# EAGLE board arduino micro based (EAGLE 7.6.0)
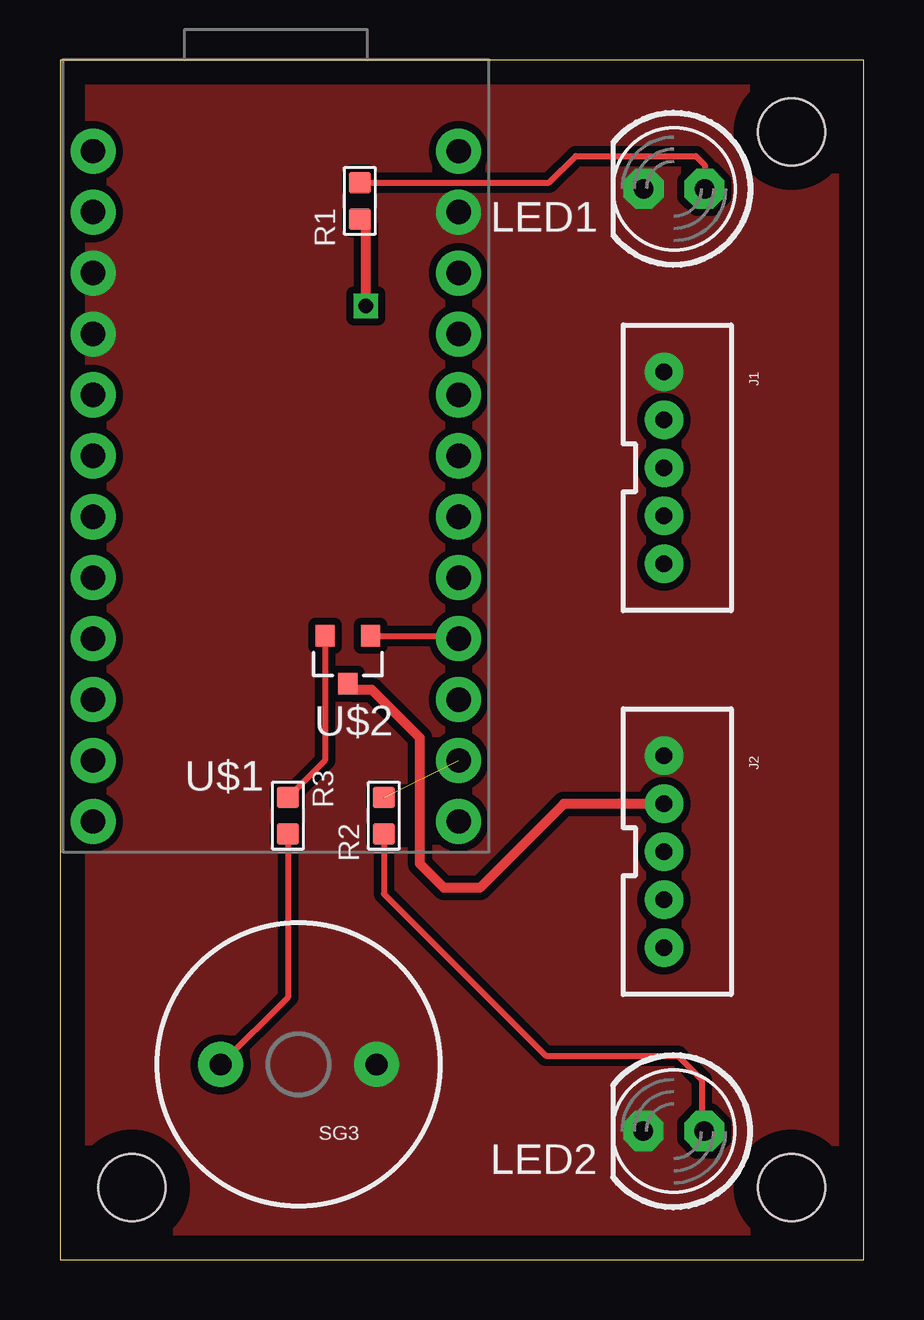
[diagram p0: board, top side]
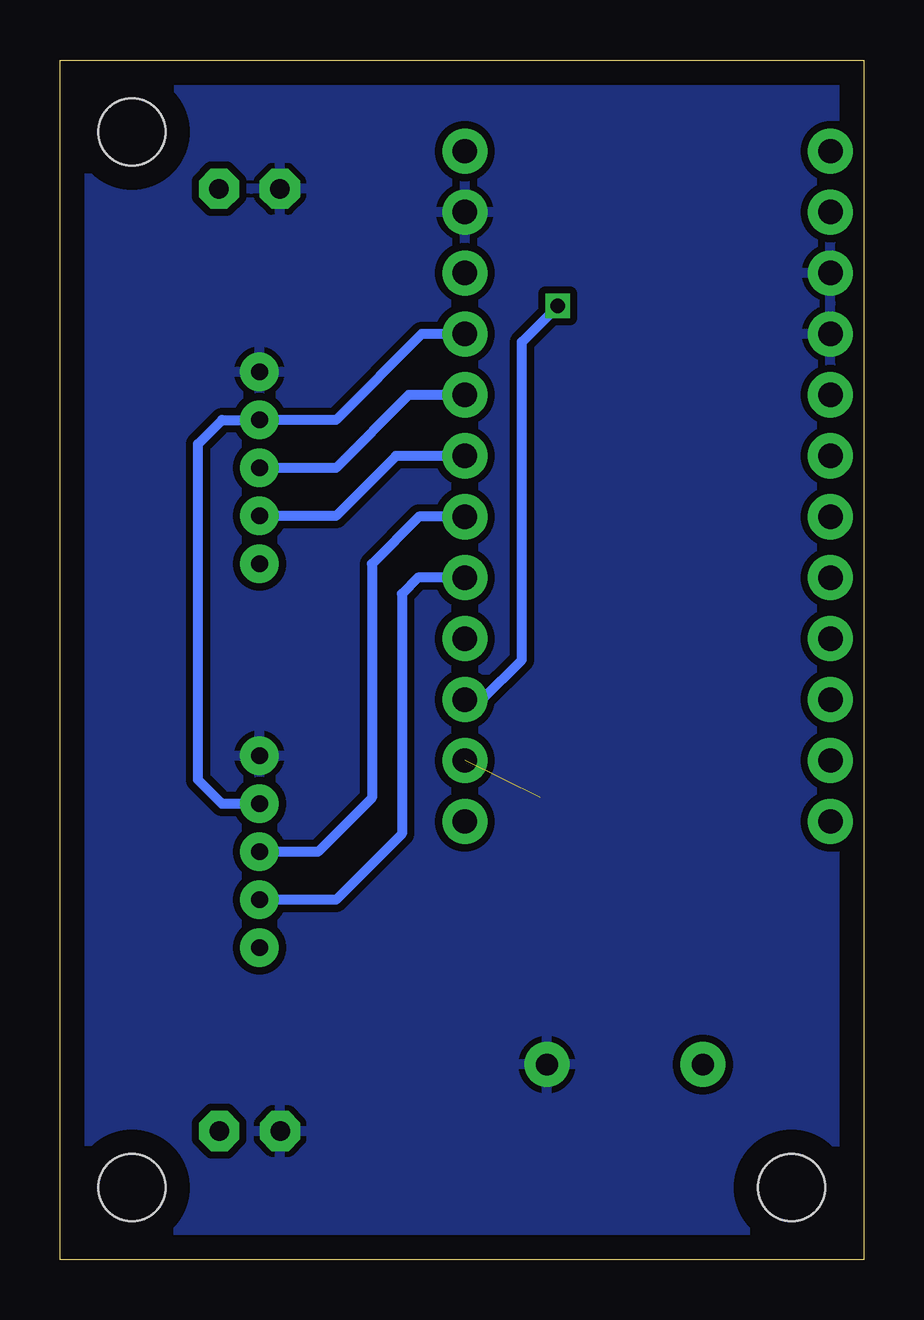
[diagram p1: board, bottom side, seen from below]

Size 33.5 x 50 mm. Coordinates in mm from the lower left corner, seen from the top.
Outline: 0,0 33.5,0 33.5,50 0,50 0,0
Copper layers (1*16): Top 0.035mm / dielectric 1.5mm / Bottom 0.035mm
Design rules "default": minimum track width 10mil, minimum drill 24mil, track to track 8mil, track to pad 8mil, pad to pad 8mil, via to via 8mil, smd to smd 8mil, copper to edge 40mil, drill to drill 8mil, minimum pad ring 10mil, minimum via ring 8mil, stop-mask expansion 4mil, vias tented up to drill 0mil, thermal gap 10mil
Holes 2.8 mm at 30.5,47 30.5,3 3,3

## Footprints (pad centres in the part's own frame; a part is rotated, then mirrored left to right if it is on the bottom)
JST-5-PTH-VERT = drill 0.7 pad 1.6: 1 -4,0.18; 2 -2,0.18; 3 0,0.18; 4 2,0.18; 5 4,0.18
LED5MM = drill 0.813 pad 1.676 octagon: A -1.27,0; K 1.27,0
R0603 = smd 0.889 x 0.889: 1 0,0.762; 2 0,-0.762
BUZZER-12MM-KIT = drill 0.9 pad 1.88: + 3.25,0; - -3.25,0
ARDUINO_PRO_MICRO = drill 1.016 pad 1.88: 1 -7.62,12.7; 2 -7.62,10.16; 3 -7.62,7.62; 4 -7.62,5.08; 5 -7.62,2.54; 6 -7.62,0; 7 -7.62,-2.54; 8 -7.62,-5.08; 9 -7.62,-7.62; 10 -7.62,-10.16; 11 -7.62,-12.7; 12 -7.62,-15.24; 13 7.62,-15.24; 14 7.62,-12.7; 15 7.62,-10.16; 16 7.62,-7.62; 17 7.62,-5.08; 18 7.62,-2.54; 19 7.62,0; 20 7.62,2.54; 21 7.62,5.08; 22 7.62,7.62; 23 7.62,10.16; 24 7.62,12.7
SOT23-3 = smd 0.8 x 0.9: 1 -0.95,-1; 2 0.95,-1; 3 0,1

## Placement (x,y rotation side)
J1  [JST-5-PTH-VERT]  25,33 270 top
J2  [JST-5-PTH-VERT]  25,17 270 top
LED1  [LED5MM]  25.6,44.63 180 top
LED2  [LED5MM]  25.59,5.35 180 top
R1  1.5K  [R0603]  12.5,44.12 0 top
R2  1.5K  [R0603]  13.5,18.5 0 top
R3  1.5K  [R0603]  9.5,18.5 180 top
SG3  BUZZERPTH-KIT  [BUZZER-12MM-KIT]  9.95,8.13 180 top
U$1  ARDUINO_PRO_MICRO  [ARDUINO_PRO_MICRO]  9,33.5 0 top
U$2  N-CHANNEL-MOSFET-BSS138  [SOT23-3]  12,25 180 top

## Library data of the parts
J1 J2 = SparkFun-Connectors
LED1 LED2 = adafruit
R1-R3 = Seeed-Resistor-2016; MPN: RC0603FR-071K5L
SG3 = SparkFun-Electromechanical; PROD_ID: COMP-08253
U$1 = SparkFun-Boards
U$2 = GeekAmmo; DATASHEET: http://www.fairchildsemi.com/ds/BS/BSS138.pdf; DIGIKEY: BSS138TR-ND; ELEMENT14: 2323154; URL: http://au.element14.com/fairchild-semiconductor/bss138/mosfet-n-ch-50v-220ma-sot-23/dp/2323154

## Nets
5V: J1.2 J2.2 U$1.21 U$2.3
BUZZ: U$1.16 U$2.1
GND: J1.1 J2.1 LED1.K LED2.K SG3.- U$1.3 U$1.4 U$1.23
LED1: R1.2 U$1.15
LED2: R2.1 U$1.14
N$1: LED1.A R1.1
N$2: LED2.A R2.2
N$3: R3.1 SG3.+
N$4: R3.2 U$2.2
SW1: J1.5
SW2: J2.5
X1: J1.3 U$1.20
X2: J2.3 U$1.18
Y1: J1.4 U$1.19
Y2: J2.4 U$1.17

## Tracks (layer width: path | path; a pad name or v marks a point on that pad's centre or on a via)
5V
  Top 0.406: J2.2 21,19 17.5,15.5 16,15.5 15,16.5 15,21.75 13,23.75 12.25,23.75 U$2.3
  Bottom 0.406: U$1.21 18.42,38.58 22,35 J1.2 26.75,35 27.75,34 27.75,20 26.75,19 J2.2
BUZZ
  Top 0.254: U$2.1 16.5,26 U$1.16
GND
  pour Bottom (isolate 0.305): 46.75,60 46.75,52 47,52 47,-3.75 -10.25,-3.75 -10.25,-2.75 -10.5,-2.75 -10,60
  pour Top (isolate 0.305, no thermals): -2.5,54.5 37,54.5 37,43 37,0.75 37,-0.75 -2.75,-0.75 -5.25,-0.75 -5.25,54.5
LED1  (via drill 0.6)
  Top 0.406: v12.75,39.75 12.75,43.11 R1.2
  Bottom 0.406: U$1.15 15.91,23.34 14.25,25 14.25,38.25 v12.75,39.75
LED2  (1 unrouted)
N$1
  Top 0.254: R1.1 20.39,44.89 21.5,46 26.5,46 26.88,45.62 LED1.A
N$2
  Top 0.254: R2.2 13.5,15.25 20.25,8.5 25.75,8.5 26.75,7.5 26.75,5.46 LED2.A
N$3
  Top 0.254: R3.1 9.5,10.93 SG3.+
N$4
  Top 0.254: U$2.2 11.05,20.81 R3.2
X1
  Bottom 0.406: U$1.20 18.96,36.04 22,33 J1.3
X2
  Bottom 0.406: U$1.18 18.54,30.96 20.5,29 20.5,19.25 22.75,17 J2.3
Y1
  Bottom 0.406: U$1.19 19.5,33.5 22,31 J1.4
Y2
  Bottom 0.406: U$1.17 18.58,28.42 19.25,27.75 19.25,17.75 22,15 J2.4